# Allegro board 1-16_Power_Splitter.brd
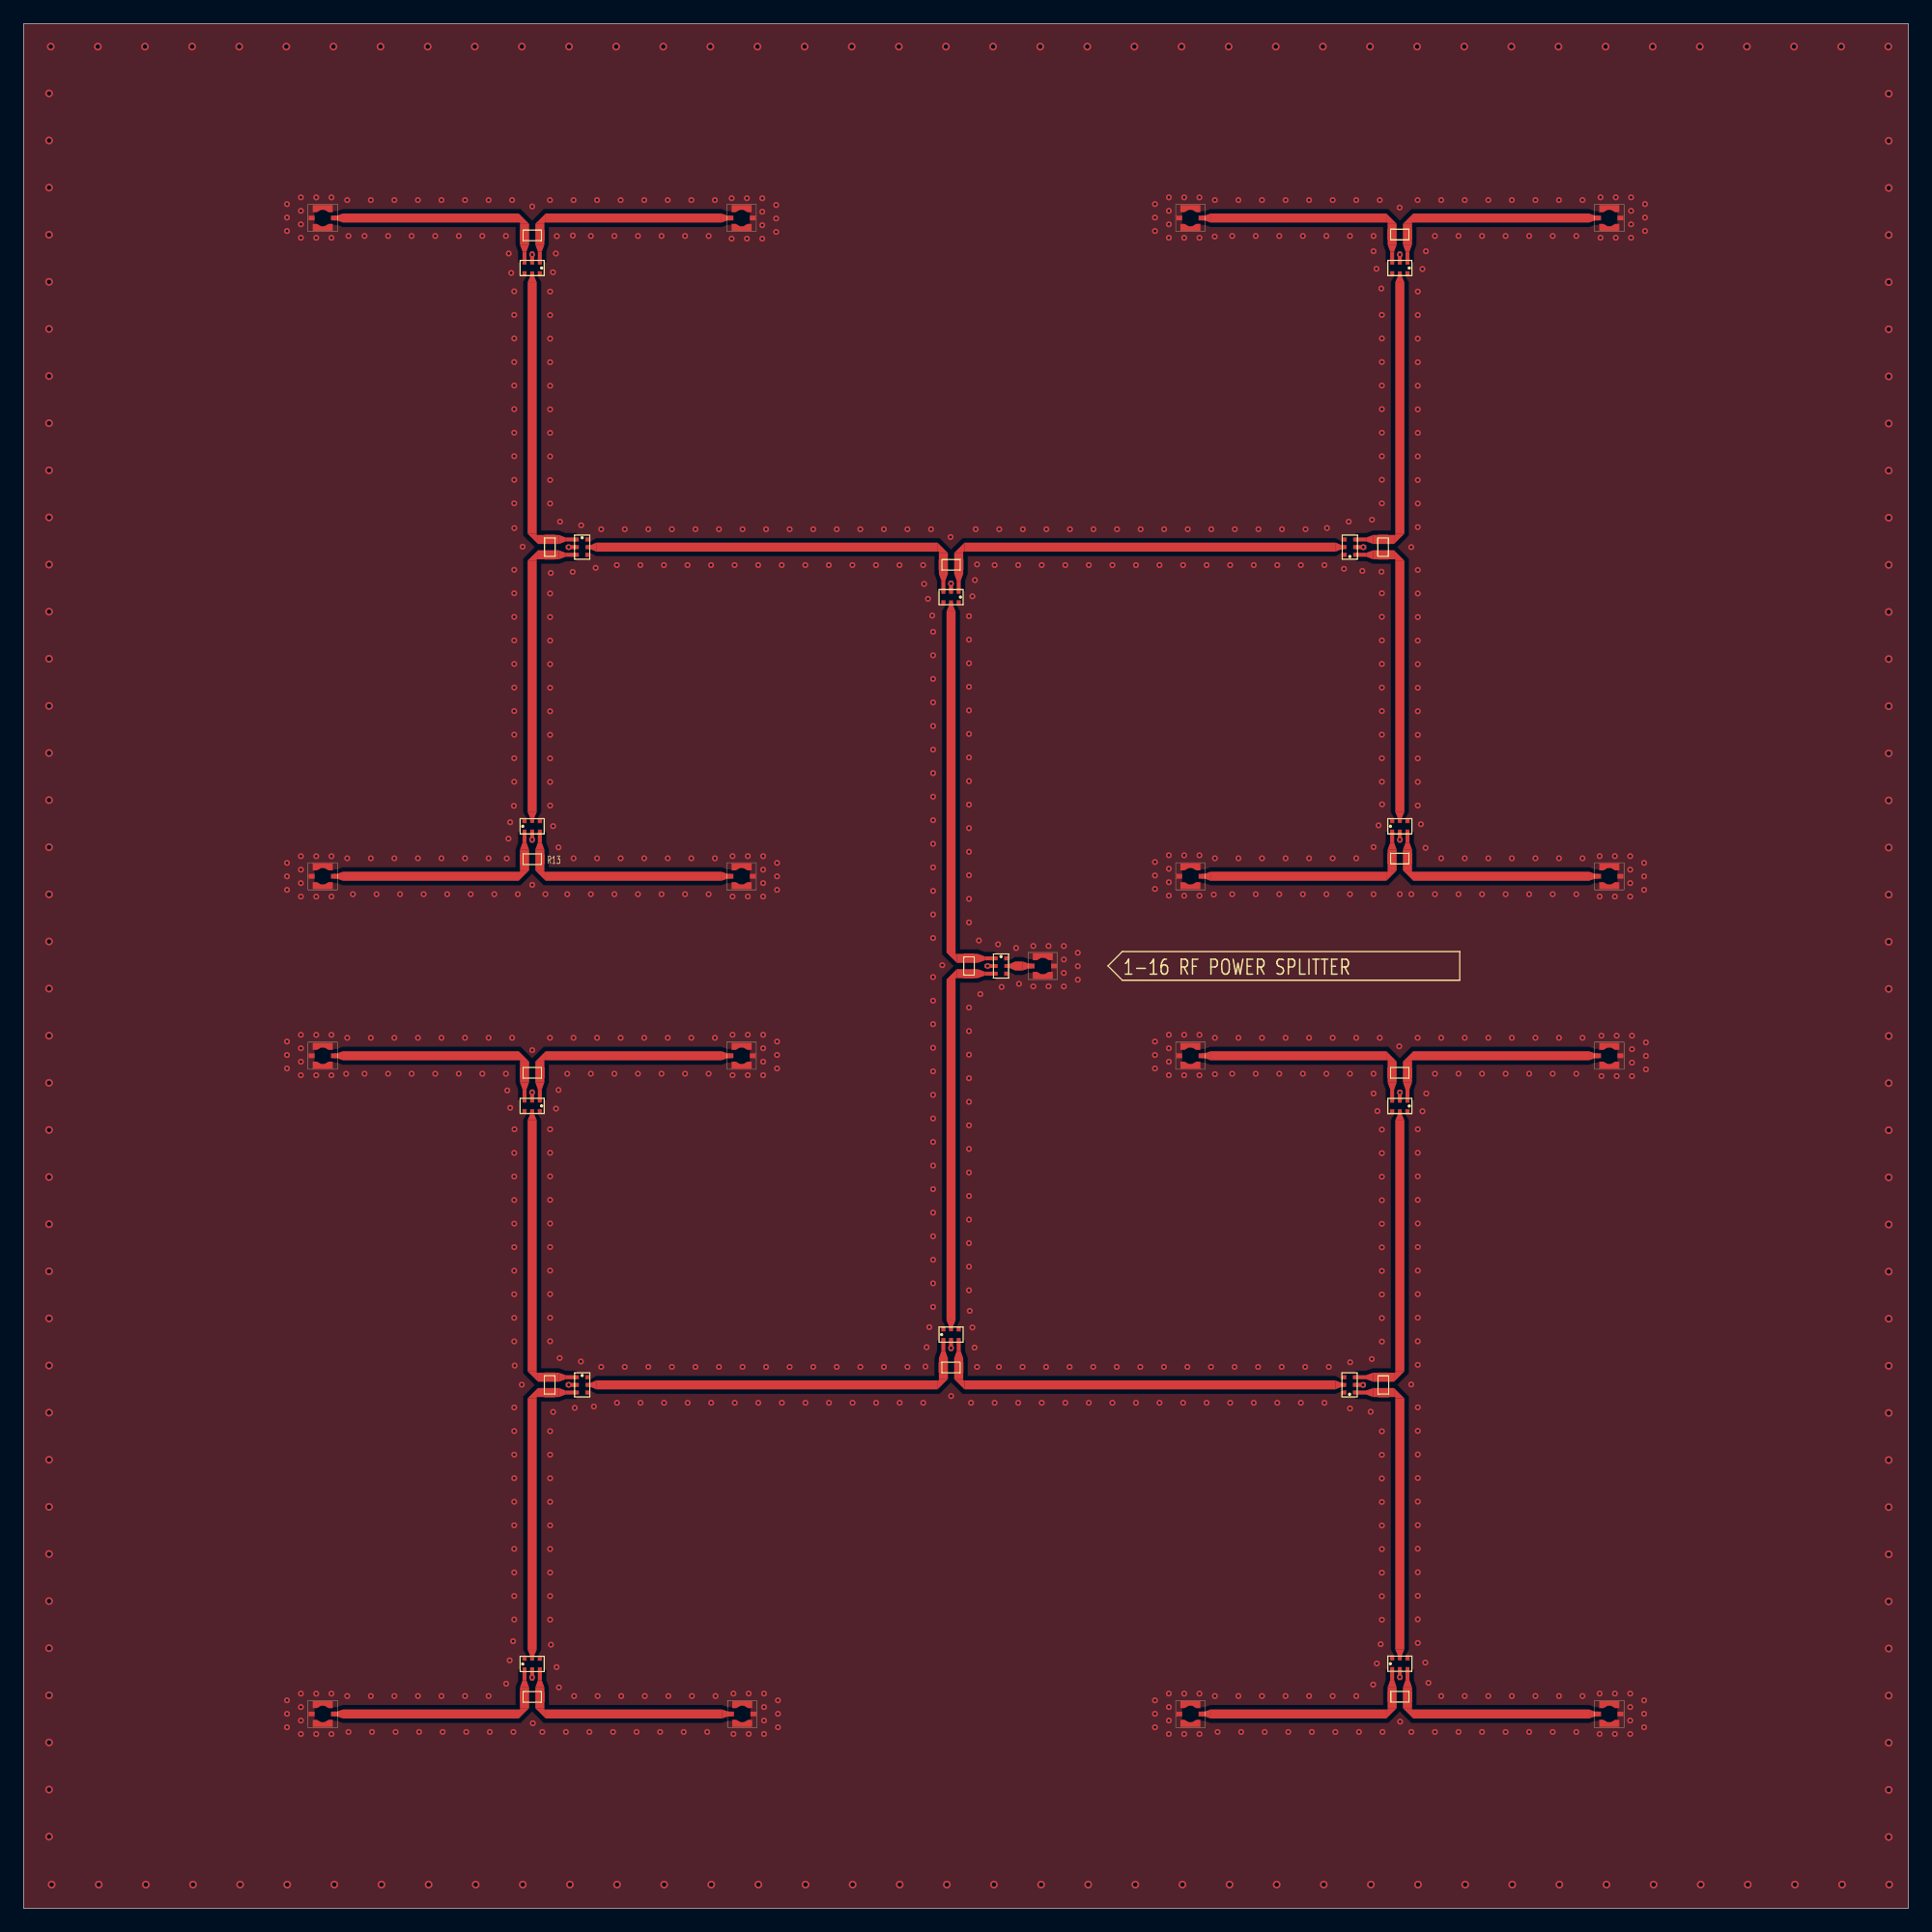
[diagram p0: board, top side]
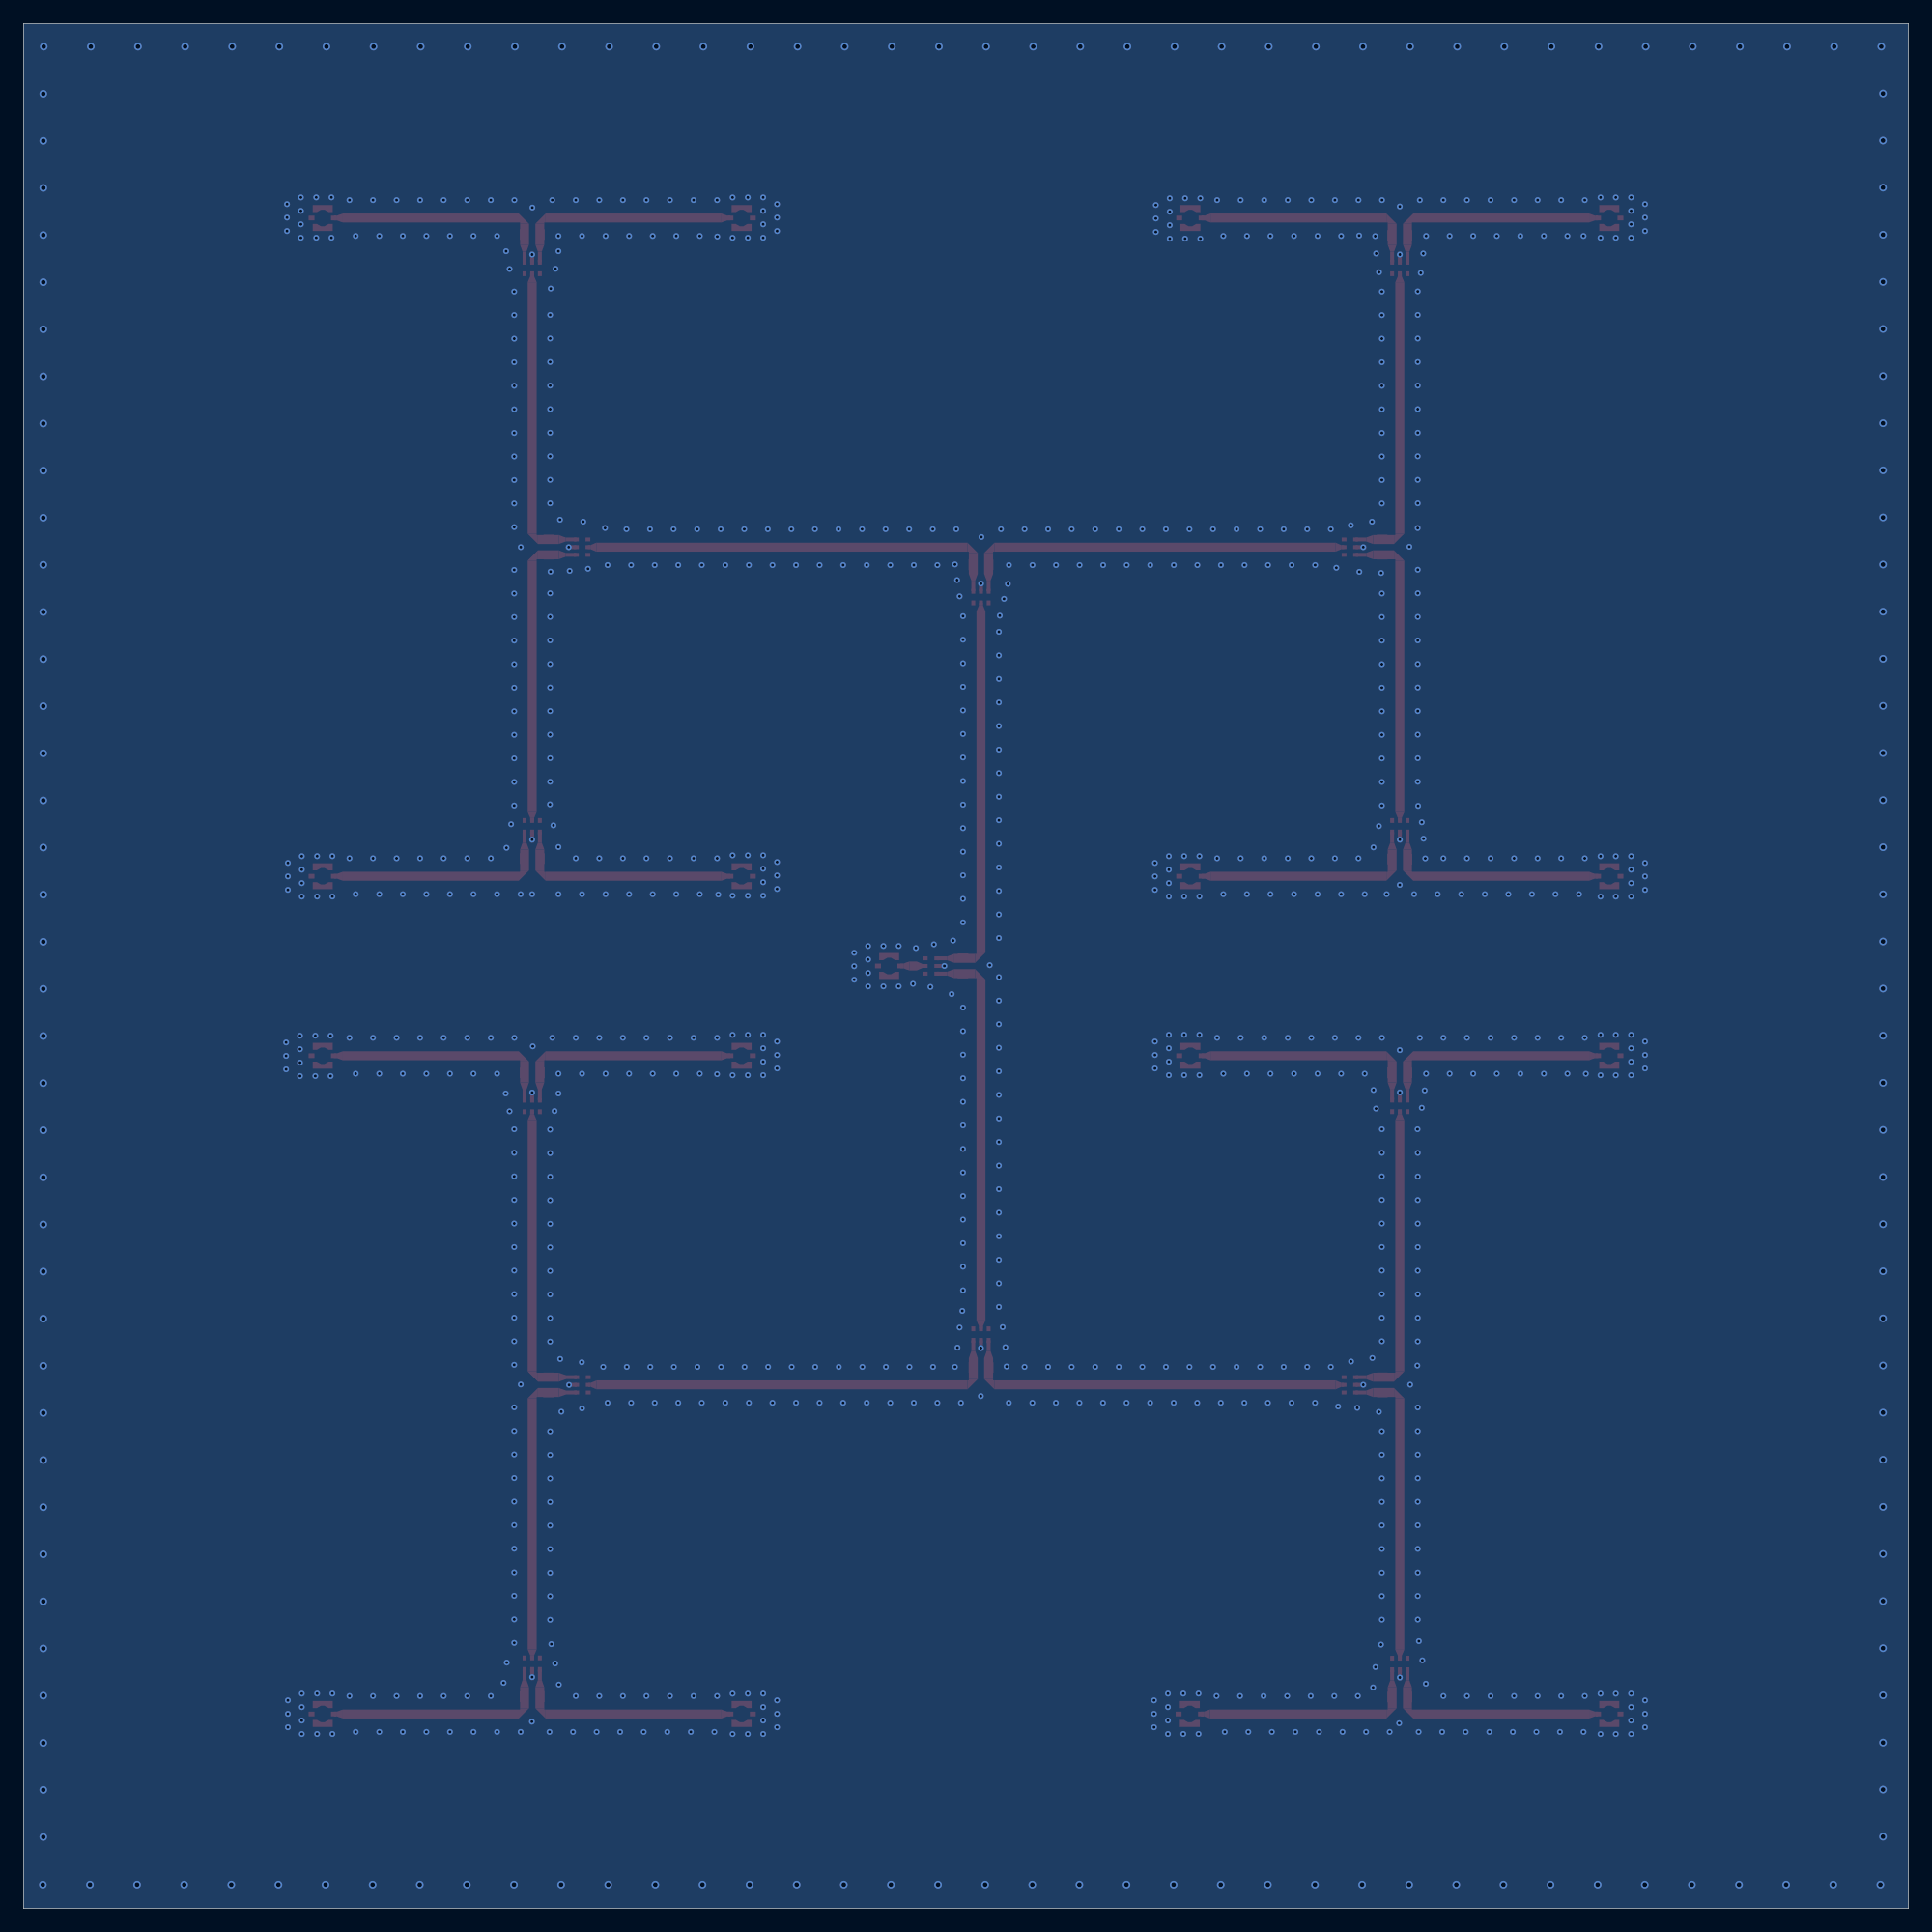
[diagram p1: board, bottom side, seen from below]

Outline 160.02 x 160.02 mm; copper layers: TOP, BOTTOM. Coordinates in mm from the lower left corner of the outline.
Outline path: 0,160.02 160.02,160.02 160.02,0 0,0 0,160.02

## Design rules (mm)
constraint set DEFAULT: min track width 0.127
net group GND: nets RFPINNET000007 RFPINNET000009 RFPINNET000012 RFPINNET000015 RFPINNET000017 RFPINNET000020 RFPINNET000024 RFPINNET000027 RFPINNET000030 RFPINNET000033 RFPINNET000037 RFPINNET000040 RFPINNET000043 RFPINNET000047 RFPINNET000052
net group N01086: nets N01086 RFPINNET000008 RFPINNET000010 RFPINNET000056 RFPINNET000059 RFPINNET000089 RFPINNET000122 RFPINNET000133
net group N01236: nets N01236 RFPINNET000011 RFPINNET000066 RFPINNET000067 RFPINNET000107 RFPINNET000196 RFPINNET000197
net group N01468: nets N01468 RFPINNET000014 RFPINNET000021 RFPINNET000072 RFPINNET000073 RFPINNET000148 RFPINNET000151 RFPINNET000170
net group N01612: nets N01612 RFPINNET000013 RFPINNET000077 RFPINNET000078 RFPINNET000142 RFPINNET000143 RFPINNET000168
net group N01924: nets N01924 RFPINNET000026 RFPINNET000034 RFPINNET000111 RFPINNET000153 RFPINNET000154 RFPINNET000189 RFPINNET000190
net group N02128: nets N02128 RFPINNET000028 RFPINNET000157 RFPINNET000158 RFPINNET000172 RFPINNET000186 RFPINNET000188
net group N02304: nets N02304 RFPINNET000016 RFPINNET000074 RFPINNET000083 RFPINNET000084 RFPINNET000155 RFPINNET000159 RFPINNET000163
net group N02444: nets N02444 RFPINNET000018 RFPINNET000087 RFPINNET000088 RFPINNET000161 RFPINNET000175 RFPINNET000176
net group N02649: nets N02649 RFPINNET000036 RFPINNET000050 RFPINNET000108 RFPINNET000109 RFPINNET000110 RFPINNET000198 RFPINNET000199
net group N02664: nets N02664 RFPINNET000038 RFPINNET000090 RFPINNET000112 RFPINNET000114 RFPINNET000213 RFPINNET000214
net group N03004: nets N03004 RFPINNET000039 RFPINNET000055 RFPINNET000069 RFPINNET000070 RFPINNET000116 RFPINNET000200 RFPINNET000201
net group N03112: nets N03112 RFPINNET000051 RFPINNET000071 RFPINNET000113 RFPINNET000115 RFPINNET000123 RFPINNET000221 RFPINNET000222
net group N03124: nets N03124 RFPINNET000053 RFPINNET000117 RFPINNET000118 RFPINNET000124 RFPINNET000215 RFPINNET000216
net group N03379: nets N03379 RFPINNET000035 RFPINNET000149 RFPINNET000150 RFPINNET000166 RFPINNET000194 RFPINNET000195
net group N03631: nets N03631 RFPINNET000062 RFPINNET000079 RFPINNET000126 RFPINNET000127 RFPINNET000152 RFPINNET000223 RFPINNET000224
net group N03641: nets N03641 RFPINNET000054 RFPINNET000119 RFPINNET000140 RFPINNET000141 RFPINNET000162 RFPINNET000219 RFPINNET000220
net group N03645: nets N03645 RFPINNET000057 RFPINNET000135 RFPINNET000136 RFPINNET000160 RFPINNET000217 RFPINNET000218
net group N03660: nets N03660 RFPINNET000022 RFPINNET000081 RFPINNET000095 RFPINNET000096 RFPINNET000147 RFPINNET000173 RFPINNET000174
net group N03664: nets N03664 RFPINNET000019 RFPINNET000091 RFPINNET000092 RFPINNET000138 RFPINNET000167 RFPINNET000171
net group N03694: nets N03694 RFPINNET000023 RFPINNET000105 RFPINNET000106 RFPINNET000169 RFPINNET000179 RFPINNET000180
net group N03732: nets N03732 RFPINNET000049 RFPINNET000103 RFPINNET000104 RFPINNET000139 RFPINNET000208 RFPINNET000209
net group N03747: nets N03747 RFPINNET000029 RFPINNET000048 RFPINNET000098 RFPINNET000099 RFPINNET000129 RFPINNET000183 RFPINNET000185
net group N03751: nets N03751 RFPINNET000031 RFPINNET000080 RFPINNET000082 RFPINNET000120 RFPINNET000181 RFPINNET000182
net group N11654: nets N11654 RFPINNET000042 RFPINNET000064 RFPINNET000065 RFPINNET000125 RFPINNET000204 RFPINNET000205
net group N13361: nets N13361 RFPINNET000058 RFPINNET000131 RFPINNET000132 RFPINNET000156 RFPINNET000225 RFPINNET000226
net group N17804: nets N17804 RFPINNET000041 RFPINNET000085 RFPINNET000086 RFPINNET000121 RFPINNET000206 RFPINNET000207
net group N18224: nets N18224 RFPINNET000044 RFPINNET000063 RFPINNET000075 RFPINNET000076 RFPINNET000130 RFPINNET000202 RFPINNET000203
net group N18325: nets N18325 RFPINNET000025 RFPINNET000045 RFPINNET000100 RFPINNET000101 RFPINNET000165 RFPINNET000177 RFPINNET000178
net group N24339: nets N24339 RFPINNET000032 RFPINNET000061 RFPINNET000145 RFPINNET000146 RFPINNET000164 RFPINNET000191 RFPINNET000192
net group N24871: nets N24871 RFPINNET000046 RFPINNET000068 RFPINNET000093 RFPINNET000094 RFPINNET000134 RFPINNET000211 RFPINNET000212
net group RFPINNET000001: nets RFPINNET000001 RFPINNET000002 RFPINNET000003 RFPINNET000004 RFPINNET000005 RFPINNET000006

## Placement (name value [footprint] x y rotation side)
IC1  PD3150J5050S2HF  [PWR_DIV]  112.6 115.57 180 top
IC2  PD3150J5050S2HF  [PWR_DIV]  116.84 91.87 90 top
IC3  PD3150J5050S2HF  [PWR_DIV]  78.74 111.33 270 top
IC4  PD3150J5050S2HF  [PWR_DIV]  82.98 80.01 0 top
IC5  PD3150J5050S2HF  [PWR_DIV]  116.84 139.27 270 top
IC6  PD3150J5050S2HF  [PWR_DIV]  43.18 139.27 270 top
IC7  PD3150J5050S2HF  [PWR_DIV]  47.42 115.57 0 top
IC8  PD3150J5050S2HF  [PWR_DIV]  43.18 91.87 90 top
IC9  PD3150J5050S2HF  [PWR_DIV]  116.84 20.78 90 top
IC10  PD3150J5050S2HF  [PWR_DIV]  43.18 68.14 270 top
IC11  PD3150J5050S2HF  [PWR_DIV]  116.84 68.13 270 top
IC12  PD3150J5050S2HF  [PWR_DIV]  47.42 44.45 0 top
IC13  PD3150J5050S2HF  [PWR_DIV]  78.74 48.72 90 top
IC14  PD3150J5050S2HF  [PWR_DIV]  43.18 20.75 90 top
IC15  PD3150J5050S2HF  [PWR_DIV]  112.57 44.45 180 top
J1  MM5829-2700  [CONNECTOR]  99.06 87.63 90 top
J2  MM5829-2700  [CONNECTOR]  86.53 80.01 270 top
J3  MM5829-2700  [CONNECTOR]  134.62 87.63 270 top
J4  MM5829-2700  [CONNECTOR]  134.62 143.51 270 top
J5  MM5829-2700  [CONNECTOR]  99.06 143.51 90 top
J6  MM5829-2700  [CONNECTOR]  60.96 143.51 270 top
J7  MM5829-2700  [CONNECTOR]  25.4 143.51 90 top
J8  MM5829-2700  [CONNECTOR]  99.06 16.51 90 top
J9  MM5829-2700  [CONNECTOR]  25.4 87.63 90 top
J10  MM5829-2700  [CONNECTOR]  134.62 16.51 270 top
J11  MM5829-2700  [CONNECTOR]  60.96 87.63 270 top
J12  MM5829-2700  [CONNECTOR]  60.96 72.39 270 top
J13  MM5829-2700  [CONNECTOR]  134.62 72.39 270 top
J14  MM5829-2700  [CONNECTOR]  25.4 72.39 90 top
J15  MM5829-2700  [CONNECTOR]  25.4 16.51 90 top
J16  MM5829-2700  [CONNECTOR]  99.06 72.39 90 top
J17  MM5829-2700  [CONNECTOR]  61.01 16.51 270 top
R1  100  [R0603]  80.27 80.01 270 top
R2  100  [R0603]  78.74 114.07 180 top
R3  100  [R0603]  115.42 115.57 90 top
R4  100  [R0603]  116.84 89.13 0 top
R5  100  [R0603]  116.84 142.11 180 top
R6  100  [R0603]  43.18 142.04 180 top
R7  100  [R0603]  78.73 45.92 0 top
R8  100  [R0603]  44.67 44.45 270 top
R9  100  [R0603]  44.68 115.57 270 top
R10  100  [R0603]  115.44 44.44 90 top
R11  100  [R0603]  43.18 17.96 0 top
R12  100  [R0603]  43.19 70.94 180 top
R13  100  [R0603]  43.18 89.08 0 top
R14  100  [R0603]  116.83 70.94 180 top
R15  100  [R0603]  116.84 17.98 0 top
RFU1  -  [MLIN#8]  84.82 80.01 180 top
RFU2  -  [MLIN#12]  83.48 80.01 0 top
RFU3  -  [MTAPER]  83.69 80.01 0 top
RFU4  -  [MLIN]  85.58 80.01 180 top
RFU5  -  [MTAPER]  85.33 80.01 180 top
RFU6  -  [MLIN#3]  82.49 80.01 180 top
RFU7  -  [MLIN#3]  82.49 80.66 180 top
RFU8  -  [MLIN#3]  82.49 79.36 180 top
RFU9  -  [MLIN#3]  78.74 111.82 90 top
RFU10  -  [MLIN#3]  78.09 111.82 90 top
RFU11  -  [MLIN#3]  79.39 111.82 90 top
RFU12  -  [MLIN#3]  46.93 115.57 180 top
RFU13  -  [MLIN#3]  46.93 116.22 180 top
RFU14  -  [MLIN#3]  46.93 114.92 180 top
RFU15  -  [MLIN#3]  43.18 139.76 90 top
RFU16  -  [MLIN#3]  42.53 139.76 90 top
RFU17  -  [MLIN#3]  43.83 139.76 90 top
RFU18  -  [MLIN#3]  43.18 91.38 270 top
RFU19  -  [MLIN#3]  43.83 91.38 270 top
RFU20  -  [MLIN#3]  42.53 91.38 270 top
RFU21  -  [MLIN#3]  113.09 115.57 0 top
RFU22  -  [MLIN#3]  113.09 114.92 0 top
RFU23  -  [MLIN#3]  113.09 116.22 0 top
RFU24  -  [MLIN#3]  116.84 139.76 90 top
RFU25  -  [MLIN#3]  117.49 139.76 90 top
RFU26  -  [MLIN#3]  116.19 139.76 90 top
RFU27  -  [MLIN#3]  116.84 91.38 270 top
RFU28  -  [MLIN#3]  116.19 91.38 270 top
RFU29  -  [MLIN#3]  117.49 91.38 270 top
RFU30  -  [MLIN#3]  78.74 48.23 270 top
RFU31  -  [MLIN#3]  78.09 48.23 270 top
RFU32  -  [MLIN#3]  79.39 48.23 270 top
RFU33  -  [MLIN#3]  46.93 44.45 180 top
RFU34  -  [MLIN#3]  46.93 45.1 180 top
RFU35  -  [MLIN#3]  46.93 43.8 180 top
RFU36  -  [MLIN#3]  43.18 68.63 90 top
RFU37  -  [MLIN#3]  42.53 68.63 90 top
RFU38  -  [MLIN#3]  43.83 68.63 90 top
RFU39  -  [MLIN#3]  43.18 20.26 270 top
RFU40  -  [MLIN#3]  42.53 20.26 270 top
RFU41  -  [MLIN#3]  43.83 20.26 270 top
RFU42  -  [MLIN#3]  113.06 44.45 0 top
RFU43  -  [MLIN#3]  113.06 43.8 0 top
RFU44  -  [MLIN#3]  113.06 45.1 0 top
RFU45  -  [MLIN#3]  116.84 68.62 90 top
RFU46  -  [MLIN#3]  117.49 68.62 90 top
RFU47  -  [MLIN#3]  116.19 68.62 90 top
RFU48  -  [MLIN#3]  116.84 20.29 270 top
RFU49  -  [MLIN#3]  117.49 20.29 270 top
RFU50  -  [MLIN#3]  116.19 20.29 270 top
RFU51  -  [MLIN#4]  78.74 81.15 90 top
RFU52  -  [MBEND#2]  79.23 80.66 180 top
RFU53  -  [MLIN#2]  79.23 80.66 0 top
RFU54  -  [MLIN#11]  78.74 49.92 90 top
RFU55  -  [MBEND]  79.23 79.36 180 top
RFU56  -  [MLIN#2]  79.23 79.36 0 top
RFU57  -  [MLIN#6]  111.4 115.57 180 top
RFU58  -  [MBEND#2]  79.39 115.08 90 top
RFU59  -  [MLIN#2]  78.09 44.94 90 top
RFU60  -  [MLIN#4]  77.6 115.57 180 top
RFU61  -  [MBEND]  78.09 115.08 90 top
RFU62  -  [MLIN#6]  111.37 44.45 180 top
RFU63  -  [MLIN#5]  43.18 116.71 90 top
RFU64  -  [MBEND#2]  43.67 116.22 180 top
RFU65  -  [MLIN#2]  43.67 45.1 0 top
RFU66  -  [MLIN#5]  43.18 93.07 90 top
RFU67  -  [MBEND]  43.67 114.92 180 top
RFU68  -  [MLIN#2]  43.67 43.8 0 top
RFU69  -  [MLIN#9]  42.04 143.51 180 top
RFU70  -  [MBEND]  42.53 143.02 90 top
RFU71  -  [MLIN#2]  42.53 71.9 270 top
RFU72  -  [MLIN#9]  59.25 143.51 180 top
RFU73  -  [MBEND#2]  43.83 143.02 90 top
RFU74  -  [MLIN#2]  43.83 71.9 270 top
RFU75  -  [MLIN#9]  42.04 87.63 180 top
RFU76  -  [MBEND#2]  42.53 88.12 270 top
RFU77  -  [MLIN#2]  42.53 17 90 top
RFU78  -  [MLIN#9]  59.25 87.63 180 top
RFU79  -  [MBEND]  43.83 88.12 270 top
RFU80  -  [MLIN#2]  43.83 17 90 top
RFU81  -  [MLIN#9]  42.04 72.39 180 top
RFU82  -  [MBEND]  42.53 71.9 90 top
RFU83  -  [MLIN#7]  116.84 45.59 90 top
RFU84  -  [MLIN#9]  59.25 72.39 180 top
RFU85  -  [MBEND#2]  43.83 71.9 90 top
RFU86  -  [MLIN#7]  116.84 21.98 90 top
RFU87  -  [MLIN#7]  43.18 45.59 90 top
RFU88  -  [MBEND#2]  43.67 45.1 180 top
RFU89  -  [MLIN#2]  116.19 17 90 top
RFU90  -  [MLIN#5]  43.18 21.96 90 top
RFU91  -  [MBEND]  43.67 43.8 180 top
RFU92  -  [MLIN#2]  117.49 17 90 top
RFU93  -  [MLIN#9]  42.04 16.51 180 top
RFU94  -  [MBEND#2]  42.53 17 270 top
RFU95  -  [MLIN#2]  116.19 71.9 270 top
RFU96  -  [MLIN#10]  59.3 16.51 180 top
RFU97  -  [MBEND]  43.83 17 270 top
RFU98  -  [MLIN#2]  117.49 71.9 270 top
RFU99  -  [MLIN#4]  77.6 44.45 180 top
RFU100  -  [MBEND#2]  78.09 44.94 270 top
RFU101  -  [MLIN#2]  116.19 88.12 90 top
RFU102  -  [MBEND]  79.39 44.94 270 top
RFU103  -  [MLIN#2]  79.39 44.94 90 top
RFU104  -  [MLIN#2]  117.49 88.12 90 top
RFU105  -  [MBEND]  116.35 45.1 0 top
RFU106  -  [MLIN#2]  116.35 45.1 180 top
RFU107  -  [MLIN#2]  78.09 115.08 270 top
RFU108  -  [MBEND#2]  116.35 43.8 0 top
RFU109  -  [MLIN#2]  116.35 43.8 180 top
RFU110  -  [MLIN#2]  79.39 115.08 270 top
RFU111  -  [MLIN#9]  115.7 16.51 180 top
RFU112  -  [MBEND#2]  116.19 17 270 top
RFU113  -  [MLIN#2]  116.35 116.22 180 top
RFU114  -  [MLIN#9]  132.91 16.51 180 top
RFU115  -  [MBEND]  117.49 17 270 top
RFU116  -  [MLIN#2]  116.35 114.92 180 top
RFU117  -  [MLIN#9]  115.7 72.39 180 top
RFU118  -  [MBEND]  116.19 71.9 90 top
RFU119  -  [MLIN#2]  116.19 143.02 270 top
RFU120  -  [MLIN#9]  132.91 72.39 180 top
RFU121  -  [MBEND#2]  117.49 71.9 90 top
RFU122  -  [MLIN#2]  117.49 143.02 270 top
RFU123  -  [MLIN#9]  115.7 87.63 180 top
RFU124  -  [MBEND#2]  116.19 88.12 270 top
RFU125  -  [MLIN#2]  42.53 143.02 270 top
RFU126  -  [MLIN#9]  132.91 87.63 180 top
RFU127  -  [MBEND]  117.49 88.12 270 top
RFU128  -  [MLIN#2]  43.83 143.02 270 top
RFU129  -  [MLIN#5]  116.84 93.07 90 top
RFU130  -  [MBEND#2]  116.35 114.92 0 top
RFU131  -  [MLIN#2]  43.67 116.22 0 top
RFU132  -  [MLIN#5]  116.84 116.71 90 top
RFU133  -  [MBEND]  116.35 116.22 0 top
RFU134  -  [MLIN#2]  43.67 114.92 0 top
RFU135  -  [MLIN#9]  115.7 143.51 180 top
RFU136  -  [MBEND]  116.19 143.02 90 top
RFU137  -  [MLIN#2]  42.53 88.12 90 top
RFU138  -  [MLIN#9]  132.91 143.51 180 top
RFU139  -  [MBEND#2]  117.49 143.02 90 top
RFU140  -  [MLIN#2]  43.83 88.12 90 top
RFU141  -  [MTAPER#2]  81.6 80.66 180 top
RFU142  -  [MTAPER#2]  81.6 79.36 180 top
RFU143  -  [MTAPER#2]  78.09 112.72 90 top
RFU144  -  [MTAPER#2]  79.39 112.72 90 top
RFU145  -  [MTAPER#2]  46.03 116.22 180 top
RFU146  -  [MTAPER#2]  46.03 114.92 180 top
RFU147  -  [MTAPER#2]  42.53 89.89 90 top
RFU148  -  [MTAPER#2]  43.83 89.89 90 top
RFU149  -  [MTAPER#2]  43.83 140.66 90 top
RFU150  -  [MTAPER#2]  42.53 140.66 90 top
RFU151  -  [MTAPER#2]  116.19 140.66 90 top
RFU152  -  [MTAPER#2]  117.49 140.66 90 top
RFU153  -  [MTAPER#2]  114.58 116.22 180 top
RFU154  -  [MTAPER#2]  114.58 114.92 180 top
RFU155  -  [MTAPER#2]  116.19 89.89 90 top
RFU156  -  [MTAPER#2]  117.49 89.89 90 top
RFU157  -  [MTAPER#2]  78.09 46.71 90 top
RFU158  -  [MTAPER#2]  79.39 46.71 90 top
RFU159  -  [MTAPER#2]  46.03 45.1 180 top
RFU160  -  [MTAPER#2]  46.03 43.8 180 top
RFU161  -  [MTAPER#2]  42.53 69.52 90 top
RFU162  -  [MTAPER#2]  43.83 69.52 90 top
RFU163  -  [MTAPER#2]  42.53 18.77 90 top
RFU164  -  [MTAPER#2]  43.83 18.77 90 top
RFU165  -  [MTAPER#2]  114.58 45.1 180 top
RFU166  -  [MTAPER#2]  114.58 43.8 180 top
RFU167  -  [MTAPER#2]  116.19 18.77 90 top
RFU168  -  [MTAPER#2]  117.49 18.77 90 top
RFU169  -  [MTAPER#2]  116.19 69.51 90 top
RFU170  -  [MTAPER#2]  117.49 69.51 90 top
RFU171  -  [MLIN#12]  78.74 110.84 270 top
RFU172  -  [MTAPER]  78.74 110.63 270 top
RFU173  -  [MLIN#12]  47.91 115.57 0 top
RFU174  -  [MTAPER]  48.12 115.57 0 top
RFU175  -  [MLIN#12]  112.11 115.57 180 top
RFU176  -  [MTAPER]  111.9 115.57 180 top
RFU177  -  [MLIN#12]  43.18 138.78 270 top
RFU178  -  [MTAPER]  43.18 138.57 270 top
RFU179  -  [MLIN]  26.35 143.51 0 top
RFU180  -  [MTAPER]  26.6 143.51 0 top
RFU181  -  [MLIN]  60.01 143.51 180 top
RFU182  -  [MTAPER]  59.76 143.51 180 top
RFU183  -  [MLIN#12]  43.18 92.36 90 top
RFU184  -  [MTAPER]  43.18 92.57 90 top
RFU185  -  [MLIN]  26.35 87.63 0 top
RFU186  -  [MTAPER]  26.6 87.63 0 top
RFU187  -  [MLIN]  60.01 87.63 180 top
RFU188  -  [MTAPER]  59.76 87.63 180 top
RFU189  -  [MLIN]  100.01 143.51 0 top
RFU190  -  [MTAPER]  100.26 143.51 0 top
RFU191  -  [MLIN]  133.67 143.51 180 top
RFU192  -  [MTAPER]  133.42 143.51 180 top
RFU193  -  [MLIN#12]  116.84 138.78 270 top
RFU194  -  [MTAPER]  116.84 138.57 270 top
RFU195  -  [MLIN#12]  116.84 92.36 90 top
RFU196  -  [MTAPER]  116.84 92.57 90 top
RFU197  -  [MLIN]  100.01 87.63 0 top
RFU198  -  [MTAPER]  100.26 87.63 0 top
RFU199  -  [MLIN]  133.67 87.63 180 top
RFU200  -  [MTAPER]  133.42 87.63 180 top
RFU201  -  [MLIN#12]  78.74 49.21 90 top
RFU202  -  [MTAPER]  78.74 49.41 90 top
RFU203  -  [MLIN#12]  47.91 44.45 0 top
RFU204  -  [MTAPER]  48.12 44.45 0 top
RFU205  -  [MLIN#12]  43.18 67.65 270 top
RFU206  -  [MTAPER]  43.18 67.44 270 top
RFU207  -  [MLIN]  60.01 72.39 180 top
RFU208  -  [MTAPER]  59.76 72.39 180 top
RFU209  -  [MLIN]  26.35 72.39 0 top
RFU210  -  [MTAPER]  26.6 72.39 0 top
RFU211  -  [MLIN#12]  43.18 21.24 90 top
RFU212  -  [MTAPER]  43.18 21.45 90 top
RFU213  -  [MLIN]  60.06 16.51 180 top
RFU214  -  [MTAPER]  59.81 16.51 180 top
RFU215  -  [MLIN]  26.35 16.51 0 top
RFU216  -  [MTAPER]  26.6 16.51 0 top
RFU217  -  [MLIN#12]  112.08 44.45 180 top
RFU218  -  [MTAPER]  111.88 44.45 180 top
RFU219  -  [MLIN#12]  116.84 67.64 270 top
RFU220  -  [MTAPER]  116.84 67.43 270 top
RFU221  -  [MLIN]  100.01 72.39 0 top
RFU222  -  [MTAPER]  100.26 72.39 0 top
RFU223  -  [MLIN]  133.67 72.39 180 top
RFU224  -  [MTAPER]  133.42 72.39 180 top
RFU225  -  [MLIN#12]  116.84 21.27 90 top
RFU226  -  [MTAPER]  116.84 21.47 90 top
RFU227  -  [MLIN]  100.01 16.51 0 top
RFU228  -  [MTAPER]  100.26 16.51 0 top
RFU229  -  [MLIN]  133.67 16.51 180 top
RFU230  -  [MTAPER]  133.42 16.51 180 top

## Library data of the parts
IC1-IC15 = Power_Divider
J1-J17 = Microwave_Coaxial_Connector
R1-R15 = R0603_100
RFU1 RFU2 RFU4 RFU6-RFU51 RFU53 RFU54 RFU56 RFU57 RFU59 RFU60 RFU62 RFU63 RFU65 RFU66 RFU68 RFU69 RFU71 RFU72 RFU74 RFU75 RFU77 RFU78 RFU80 RFU81 RFU83 RFU84 RFU86 RFU87 RFU89 RFU90 RFU92 RFU93 RFU95 RFU96 RFU98 RFU99 RFU101 RFU103 RFU104 RFU106 RFU107 RFU109-RFU111 RFU113 RFU114 RFU116 RFU117 RFU119 RFU120 RFU122 RFU123 RFU125 RFU126 RFU128 RFU129 RFU131 RFU132 RFU134 RFU135 RFU137 RFU138 RFU140 RFU171 RFU173 RFU175 RFU177 RFU179 RFU181 RFU183 RFU185 RFU187 RFU189 RFU191 RFU193 RFU195 RFU197 RFU199 RFU201 RFU203 RFU205 RFU207 RFU209 RFU211 RFU213 RFU215 RFU217 RFU219 RFU221 RFU223 RFU225 RFU227 RFU229 = MLIN
RFU3 RFU5 RFU141-RFU170 RFU172 RFU174 RFU176 RFU178 RFU180 RFU182 RFU184 RFU186 RFU188 RFU190 RFU192 RFU194 RFU196 RFU198 RFU200 RFU202 RFU204 RFU206 RFU208 RFU210 RFU212 RFU214 RFU216 RFU218 RFU220 RFU222 RFU224 RFU226 RFU228 RFU230 = MTAPER
RFU52 RFU55 RFU58 RFU61 RFU64 RFU67 RFU70 RFU73 RFU76 RFU79 RFU82 RFU85 RFU88 RFU91 RFU94 RFU97 RFU100 RFU102 RFU105 RFU108 RFU112 RFU115 RFU118 RFU121 RFU124 RFU127 RFU130 RFU133 RFU136 RFU139 = MBEND

## Footprints (pads in the part's own frame, mm; a bottom-side part is the same pattern mirrored in y, then rotated)
CONNECTOR
  rect 0.4x0.5 smd: 1(0,-0.95) 3(0,0.95)
  custom 0.6x1.7 smd: 2(0.8,0) 4(-0.8,0)
MBEND
  round 0 smd: 1(0,0) 2(0.49,0.49)
MBEND#2
  round 0 smd: 1(0,0) 2(0.49,-0.49)
MLIN
  round 0 smd: 1(0,0) 2(0.25,0)
MLIN#12
  round 0 smd: 1(0,0) 2(0.205,0)
MLIN#2
  round 0 smd: 1(0,0) 2(1.774,0)
MLIN#3
  round 0 smd: 1(0,0) 2(0.899,0)
MLIN#4
  round 0 smd: 1(0,0) 2(28.975,0)
MLIN#5
  round 0 smd: 1(0,0) 2(21.355,0)
MLIN#6
  round 0 smd: 1(0,0) 2(31.49,0)
MLIN#7
  round 0 smd: 1(0,0) 2(21.333,0)
MLIN#8
  round 0 smd: 1(0,0) 2(0.631,0)
MLIN#9
  round 0 smd: 1(0,0) 2(14.932,0)
MLIN#10
  round 0 smd: 1(0,0) 2(14.982,0)
MLIN#11
  round 0 smd: 1(0,0) 2(28.95,0)
MTAPER
  round 0 smd: 1(0,0) 2(0.508,0)
MTAPER#2
  round 0 smd: 1(0,0) 2(0.617,0)
PWR_DIV
  rect 0.41x0.33 smd: 1(-0.49,0.65) 2(-0.49,0) 3(-0.49,-0.65) 4(0.49,-0.65) 5(0.49,0) 6(0.49,0.65)
R0603
  rect 0.6x0.9 smd: 1(-0.75,0) 2(0.75,0)

## Nets
GND: IC1.2 IC1.4 IC1.6 IC2.2 IC2.4 IC2.6 IC3.2 IC3.4 IC3.6 IC4.2 IC4.4 IC4.6 IC5.2 IC5.4 IC5.6 IC6.2 IC6.4 IC6.6 IC7.2 IC7.4 IC7.6 IC8.2 IC8.4 IC8.6 IC9.2 IC9.4 IC9.6 IC10.2 IC10.4 IC10.6 IC11.2 IC11.4 IC11.6 IC12.2 IC12.4 IC12.6 IC13.2 IC13.4 IC13.6 IC14.2 IC14.4 IC14.6 IC15.2 IC15.4 IC15.6 J1.2 J1.3 J1.4(OUTER3) J2.2 J2.3 J2.4(OUTER3) J3.2 J3.3 J3.4(OUTER3) J4.2 J4.3 J4.4(OUTER3) J5.2 J5.3 J5.4(OUTER3) J6.2 J6.3 J6.4(OUTER3) J7.2 J7.3 J7.4(OUTER3) J8.2 J8.3 J8.4(OUTER3) J9.2 J9.3 J9.4(OUTER3) J10.2 J10.3 J10.4(OUTER3) J11.2 J11.3 J11.4(OUTER3) J12.2 J12.3 J12.4(OUTER3) J13.2 J13.3 J13.4(OUTER3) J14.2 J14.3 J14.4(OUTER3) J15.2 J15.3 J15.4(OUTER3) J16.2 J16.3 J16.4(OUTER3) J17.2 J17.3 J17.4(OUTER3) RFU6.1 RFU9.1 RFU12.1 RFU15.1 RFU18.1 RFU21.1 RFU24.1 RFU27.1 RFU30.1 RFU33.1 RFU36.1 RFU39.1 RFU42.1 RFU45.1 RFU48.1
RFPINNET000001: RFU2.1
RFPINNET000002: J2.1 RFU4.1
RFPINNET000003: RFU1.2 RFU3.2
RFPINNET000004: RFU2.2 RFU3.1
RFPINNET000005: RFU1.1 RFU5.2
RFPINNET000006: RFU4.2 RFU5.1
RFPINNET000007: RFU6.2
RFPINNET000008: IC4.1(OUT2) RFU7.1
RFPINNET000009: RFU9.2
RFPINNET000010: RFU7.2 RFU141.1
RFPINNET000011: RFU8.2 RFU142.1
RFPINNET000012: RFU12.2
RFPINNET000013: RFU10.2 RFU143.1
RFPINNET000014: RFU11.2 RFU144.1
RFPINNET000015: RFU15.2
RFPINNET000016: RFU13.2 RFU145.1
RFPINNET000017: RFU18.2
RFPINNET000018: RFU14.2 RFU146.1
RFPINNET000019: RFU16.2 RFU150.1
RFPINNET000020: RFU21.2
RFPINNET000021: IC3.1(OUT2) RFU11.1
RFPINNET000022: RFU17.2 RFU149.1
RFPINNET000023: RFU19.2 RFU148.2
RFPINNET000024: RFU24.2
RFPINNET000025: RFU20.2 RFU147.2
RFPINNET000026: RFU22.2 RFU154.2
RFPINNET000027: RFU27.2
RFPINNET000028: RFU23.2 RFU153.2
RFPINNET000029: RFU25.2 RFU152.1
RFPINNET000030: RFU30.2
RFPINNET000031: RFU26.2 RFU151.1
RFPINNET000032: RFU28.2 RFU155.2
RFPINNET000033: RFU33.2
RFPINNET000034: IC1.1(OUT2) RFU22.1
RFPINNET000035: RFU29.2 RFU156.2
RFPINNET000036: RFU31.2 RFU157.2
RFPINNET000037: RFU36.2
RFPINNET000038: RFU32.2 RFU158.2
RFPINNET000039: RFU34.2 RFU159.1
RFPINNET000040: RFU39.2
RFPINNET000041: RFU35.2 RFU160.1
RFPINNET000042: RFU37.2 RFU161.1
RFPINNET000043: RFU42.2
RFPINNET000044: RFU38.2 RFU162.1
RFPINNET000045: IC8.1(OUT2) RFU20.1
RFPINNET000046: RFU40.2 RFU163.2
RFPINNET000047: RFU45.2
RFPINNET000048: IC5.1(OUT2) RFU25.1
RFPINNET000049: RFU41.2 RFU164.2
RFPINNET000050: IC13.1(OUT2) RFU31.1
RFPINNET000051: RFU43.2 RFU166.2
RFPINNET000052: RFU48.2
RFPINNET000053: RFU44.2 RFU165.2
RFPINNET000054: RFU46.2 RFU170.1
RFPINNET000055: IC12.1(OUT2) RFU34.1
RFPINNET000056: RFU51.1 RFU52.2
RFPINNET000057: RFU47.2 RFU169.1
RFPINNET000058: RFU49.2 RFU168.2
RFPINNET000059: RFU52.1 RFU53.1
RFPINNET000061: IC2.1(OUT2) RFU28.1
RFPINNET000062: RFU50.2 RFU167.2
RFPINNET000063: IC10.1(OUT2) RFU38.1
RFPINNET000064: RFU81.1 RFU82.2
RFPINNET000065: RFU71.1 RFU82.1
RFPINNET000066: RFU54.2 RFU55.2
RFPINNET000067: RFU55.1 RFU56.1
RFPINNET000068: IC14.1(OUT2) RFU40.1
RFPINNET000069: RFU87.1 RFU88.2
RFPINNET000070: RFU65.1 RFU88.1
RFPINNET000071: IC15.1(OUT2) RFU43.1
RFPINNET000072: RFU57.2 RFU58.2
RFPINNET000073: RFU58.1 RFU110.1
RFPINNET000074: IC7.1(OUT2) RFU13.1
RFPINNET000075: RFU84.2 RFU85.2
RFPINNET000076: RFU74.1 RFU85.1
RFPINNET000077: RFU60.1 RFU61.2
RFPINNET000078: RFU61.1 RFU107.1
RFPINNET000079: IC9.1(OUT2) RFU50.1
RFPINNET000080: RFU135.1 RFU136.2
RFPINNET000081: IC6.1(OUT2) RFU17.1
RFPINNET000082: RFU119.1 RFU136.1
RFPINNET000083: RFU63.1 RFU64.2
RFPINNET000084: RFU64.1 RFU131.1
RFPINNET000085: RFU90.2 RFU91.2
RFPINNET000086: RFU68.1 RFU91.1
RFPINNET000087: RFU66.2 RFU67.2
RFPINNET000088: RFU67.1 RFU134.1
RFPINNET000089: RFU53.2 RFU141.2
RFPINNET000090: RFU62.2 RFU102.2
RFPINNET000091: RFU69.1 RFU70.2
RFPINNET000092: RFU70.1 RFU125.1
RFPINNET000093: RFU93.1 RFU94.2
RFPINNET000094: RFU77.1 RFU94.1
RFPINNET000095: RFU72.2 RFU73.2
RFPINNET000096: RFU73.1 RFU128.1
RFPINNET000098: RFU138.2 RFU139.2
RFPINNET000099: RFU122.1 RFU139.1
RFPINNET000100: RFU75.1 RFU76.2
RFPINNET000101: RFU76.1 RFU137.1
RFPINNET000103: RFU96.2 RFU97.2
RFPINNET000104: RFU80.1 RFU97.1
RFPINNET000105: RFU78.2 RFU79.2
RFPINNET000106: RFU79.1 RFU140.1
RFPINNET000107: RFU56.2 RFU142.2
RFPINNET000108: RFU59.2 RFU157.1
RFPINNET000109: RFU99.1 RFU100.2
RFPINNET000110: RFU59.1 RFU100.1
RFPINNET000111: RFU116.2 RFU154.1
RFPINNET000112: RFU102.1 RFU103.1
RFPINNET000113: RFU86.2 RFU108.2
RFPINNET000114: RFU103.2 RFU158.1
RFPINNET000115: RFU108.1 RFU109.1
RFPINNET000116: RFU65.2 RFU159.2
RFPINNET000117: RFU83.1 RFU105.2
RFPINNET000118: RFU105.1 RFU106.1
RFPINNET000119: IC11.1(OUT2) RFU46.1
RFPINNET000120: RFU119.2 RFU151.2
RFPINNET000121: RFU68.2 RFU160.2
RFPINNET000122: RFU51.2 RFU172.2
RFPINNET000123: RFU109.2 RFU166.1
RFPINNET000124: RFU106.2 RFU165.1
RFPINNET000125: RFU71.2 RFU161.2
RFPINNET000126: RFU111.1 RFU112.2
RFPINNET000127: RFU89.1 RFU112.1
RFPINNET000129: RFU122.2 RFU152.2
RFPINNET000130: RFU74.2 RFU162.2
RFPINNET000131: RFU114.2 RFU115.2
RFPINNET000132: RFU92.1 RFU115.1
RFPINNET000133: RFU171.2 RFU172.1
RFPINNET000134: RFU77.2 RFU163.1
RFPINNET000135: RFU117.1 RFU118.2
RFPINNET000136: RFU95.1 RFU118.1
RFPINNET000138: RFU125.2 RFU150.2
RFPINNET000139: RFU80.2 RFU164.1
RFPINNET000140: RFU120.2 RFU121.2
RFPINNET000141: RFU98.1 RFU121.1
RFPINNET000142: RFU60.2 RFU174.2
RFPINNET000143: RFU173.2 RFU174.1
RFPINNET000145: RFU123.1 RFU124.2
RFPINNET000146: RFU101.1 RFU124.1
RFPINNET000147: RFU128.2 RFU149.2
RFPINNET000148: RFU57.1 RFU176.2
RFPINNET000149: RFU126.2 RFU127.2
RFPINNET000150: RFU104.1 RFU127.1
RFPINNET000151: RFU175.2 RFU176.1
RFPINNET000152: RFU89.2 RFU167.1
RFPINNET000153: RFU129.2 RFU130.2
RFPINNET000154: RFU116.1 RFU130.1
RFPINNET000155: RFU131.2 RFU145.2
RFPINNET000156: RFU92.2 RFU168.1
RFPINNET000157: RFU132.1 RFU133.2
RFPINNET000158: RFU113.1 RFU133.1
RFPINNET000159: RFU63.2 RFU178.2
RFPINNET000160: RFU95.2 RFU169.2
RFPINNET000161: RFU134.2 RFU146.2
RFPINNET000162: RFU98.2 RFU170.2
RFPINNET000163: RFU177.2 RFU178.1
RFPINNET000164: RFU101.2 RFU155.1
RFPINNET000165: RFU137.2 RFU147.1
RFPINNET000166: RFU104.2 RFU156.1
RFPINNET000167: RFU69.2 RFU180.2
RFPINNET000168: RFU107.2 RFU143.2
RFPINNET000169: RFU140.2 RFU148.1
RFPINNET000170: RFU110.2 RFU144.2
RFPINNET000171: RFU179.2 RFU180.1
RFPINNET000172: RFU113.2 RFU153.1
RFPINNET000173: RFU72.1 RFU182.2
RFPINNET000174: RFU181.2 RFU182.1
RFPINNET000175: RFU66.1 RFU184.2
RFPINNET000176: RFU183.2 RFU184.1
RFPINNET000177: RFU75.2 RFU186.2
RFPINNET000178: RFU185.2 RFU186.1
RFPINNET000179: RFU78.1 RFU188.2
RFPINNET000180: RFU187.2 RFU188.1
RFPINNET000181: RFU135.2 RFU190.2
RFPINNET000182: RFU189.2 RFU190.1
RFPINNET000183: RFU138.1 RFU192.2
RFPINNET000185: RFU191.2 RFU192.1
RFPINNET000186: RFU132.2 RFU194.2
RFPINNET000188: RFU193.2 RFU194.1
RFPINNET000189: RFU129.1 RFU196.2
RFPINNET000190: RFU195.2 RFU196.1
RFPINNET000191: RFU123.2 RFU198.2
RFPINNET000192: RFU197.2 RFU198.1
RFPINNET000194: RFU126.1 RFU200.2
RFPINNET000195: RFU199.2 RFU200.1
RFPINNET000196: RFU54.1 RFU202.2
RFPINNET000197: RFU201.2 RFU202.1
RFPINNET000198: RFU99.2 RFU204.2
RFPINNET000199: RFU203.2 RFU204.1
RFPINNET000200: RFU87.2 RFU206.2
RFPINNET000201: RFU205.2 RFU206.1
RFPINNET000202: RFU84.1 RFU208.2
RFPINNET000203: RFU207.2 RFU208.1
RFPINNET000204: RFU81.2 RFU210.2
RFPINNET000205: RFU209.2 RFU210.1
RFPINNET000206: RFU90.1 RFU212.2
RFPINNET000207: RFU211.2 RFU212.1
RFPINNET000208: RFU96.1 RFU214.2
RFPINNET000209: RFU213.2 RFU214.1
RFPINNET000211: RFU93.2 RFU216.2
RFPINNET000212: RFU215.2 RFU216.1
RFPINNET000213: RFU62.1 RFU218.2
RFPINNET000214: RFU217.2 RFU218.1
RFPINNET000215: RFU83.2 RFU220.2
RFPINNET000216: RFU219.2 RFU220.1
RFPINNET000217: RFU117.2 RFU222.2
RFPINNET000218: RFU221.2 RFU222.1
RFPINNET000219: RFU120.1 RFU224.2
RFPINNET000220: RFU223.2 RFU224.1
RFPINNET000221: RFU86.1 RFU226.2
RFPINNET000222: RFU225.2 RFU226.1
RFPINNET000223: RFU111.2 RFU228.2
RFPINNET000224: RFU227.2 RFU228.1
RFPINNET000225: RFU114.1 RFU230.2
RFPINNET000226: RFU229.2 RFU230.1
N01086: IC3.5 R1.2 RFU171.1
N01236: IC4.3 IC13.5 R1.1 RFU8.1 RFU201.1
N01468: IC1.5 R2.1 RFU175.1
N01612: IC3.3 IC7.5 R2.2 RFU10.1 RFU173.1
N01924: IC2.5 R3.1 RFU195.1
N02128: IC1.3 IC5.5 R3.2 RFU23.1 RFU193.1
N02304: IC6.5 R9.1 RFU177.1
N02444: IC7.3 IC8.5 R9.2 RFU14.1 RFU183.1
N02649: IC12.5 R7.1 RFU203.1
N02664: IC13.3 IC15.5 R7.2 RFU32.1 RFU217.1
N03004: IC10.5 R8.1 RFU205.1
N03112: IC9.5 R10.1 RFU225.1
N03124: IC11.5 IC15.3 R10.2 RFU44.1 RFU219.1
N03379: IC2.3 J3.1 R4.1 RFU29.1 RFU199.1
N03631: J8.1 R15.1 RFU227.1
N03641: J13.1 R14.1 RFU223.1
N03645: IC11.3 J16.1 R14.2 RFU47.1 RFU221.1
N03660: J6.1 R6.1 RFU181.1
N03664: IC6.3 J7.1 R6.2 RFU16.1 RFU179.1
N03694: IC8.3 J11.1 R13.2 RFU19.1 RFU187.1
N03732: IC14.3 J17.1 R11.2 RFU41.1 RFU213.1
N03747: J4.1 R5.1 RFU191.1
N03751: IC5.3 J5.1 R5.2 RFU26.1 RFU189.1
N07610: IC4.5
N11654: IC10.3 J14.1 R12.2 RFU37.1 RFU209.1
N13361: IC9.3 J10.1 R15.2 RFU49.1 RFU229.1
N17804: IC12.3 IC14.5 R8.2 RFU35.1 RFU211.1
N18224: J12.1 R12.1 RFU207.1
N18325: J9.1 R13.1 RFU185.1
N24339: J1.1 R4.2 RFU197.1
N24871: J15.1 R11.1 RFU215.1

## Via types
v1: diameter 0.499, hole 0.249, TOP to BOTTOM, 876 vias
v2: diameter 0.65, hole 0.4, TOP to BOTTOM, 156 vias

## Routing (per net, layer and track width the routed paths; a pad name or vN(x,y) marks a point on that pad's centre or on a via; arc(x,y) is an arc through that point)
GND:
  vias: v1(22.36,144.69) v1(22.36,143.55) v1(22.36,142.41) v1(22.36,88.76) v1(22.36,87.62) v1(22.36,86.47) v1(22.36,73.6) v1(22.36,72.45) v1(22.36,71.31) v1(22.36,17.67) v1(22.36,16.52) v1(22.36,15.38) v1(23.55,145.26) v1(23.55,144.12) v1(23.55,142.98) v1(23.55,141.83) v1(23.55,89.33) v1(23.55,88.19) v1(23.55,87.05) v1(23.55,85.9) v1(23.55,74.17) v1(23.55,73.03) v1(23.55,71.88) v1(23.55,70.74) v1(23.55,18.24) v1(23.55,17.09) v1(23.55,15.95) v1(23.55,14.81) v1(24.85,145.26) v1(24.85,141.83) v1(24.85,89.33) v1(24.85,85.9) v1(24.85,74.16) v1(24.85,70.74) v1(24.85,18.23) v1(24.85,14.8) v1(26.14,145.26) v1(26.14,141.83) v1(26.14,89.33) v1(26.14,85.9) v1(26.14,74.16) v1(26.14,70.74) v1(26.14,18.23) v1(26.14,14.8) v1(27.39,70.86) v1(27.48,145.03) v1(27.48,89.15) v1(27.48,73.91) v1(27.48,18.03) v1(27.58,141.99) v1(27.58,14.99) v1(27.96,86.11) v1(28.95,141.99) v1(28.95,70.87) v1(29.48,145.03) v1(29.48,89.15) v1(29.48,73.91) v1(29.48,18.03) v1(29.58,14.99) v1(29.96,86.11) v1(30.95,141.99) v1(30.95,70.87) v1(31.48,145.03) v1(31.48,89.15) v1(31.48,73.91) v1(31.48,18.03) v1(31.58,14.99) v1(31.96,86.11) v1(32.95,141.99) v1(32.95,70.87) v1(33.48,145.03) v1(33.48,89.15) v1(33.48,73.91) v1(33.48,18.03) v1(33.58,14.99) v1(33.96,86.11) v1(34.95,141.99) v1(34.95,70.87) v1(35.48,145.03) v1(35.48,89.15) v1(35.48,73.91) v1(35.48,18.03) v1(35.58,14.99) v1(35.96,86.11) v1(36.95,141.99) v1(36.95,70.87) v1(37.48,145.03) v1(37.48,89.15) v1(37.48,73.91) v1(37.48,18.03) v1(37.58,14.99) v1(37.96,86.11) v1(38.95,141.99) v1(38.95,70.87) v1(39.48,145.03) v1(39.48,89.15) v1(39.48,73.91) v1(39.48,18.03) v1(39.58,14.99) v1(39.96,86.11) v1(40.95,141.99) v1(40.95,70.87) v1(41.02,89.14) v1(40.97,19.08) v1(41.07,69.45) v1(41.19,140.5) v1(41.17,90.82) v1(41.31,92.21) v1(41.31,67.97) v1(41.27,21.06) v1(41.4,138.85) v1(41.48,145.03) v1(41.48,73.91) v1(41.63,93.61) v1(41.56,22.69) v1(41.58,14.99) v1(41.66,137.29) v1(41.66,135.29) v1(41.66,133.29) v1(41.66,131.29) v1(41.66,129.29) v1(41.66,127.29) v1(41.66,125.29) v1(41.66,123.29) v1(41.66,121.29) v1(41.66,119.29) v1(41.66,117.19) v1(41.66,113.65) v1(41.66,111.65) v1(41.66,109.65) v1(41.66,107.65) v1(41.66,105.65) v1(41.66,103.65) v1(41.66,101.65) v1(41.66,99.65) v1(41.66,97.65) v1(41.66,95.65) v1(41.68,66.15) v1(41.66,64.14) v1(41.66,62.14) v1(41.66,60.14) v1(41.66,58.14) v1(41.66,56.14) v1(41.66,54.14) v1(41.66,52.14) v1(41.66,50.14) v1(41.66,48.14) v1(41.69,46.09) v1(41.66,42.53) v1(41.66,40.53) v1(41.66,38.53) v1(41.66,36.53) v1(41.66,34.53) v1(41.66,32.53) v1(41.66,30.53) v1(41.66,28.53) v1(41.66,26.53) v1(41.66,24.53) v1(41.96,86.11) v1(42.3,44.46) v1(42.37,115.6) v1(43.18,144.49) v1(43.18,140.41) v1(43.18,90.74) v1(43.19,86.9) v1(43.18,72.87) v1(43.18,69.28) v1(43.18,19.61) v1(43.23,15.72) v1(44.04,14.99) v1(44.3,86.11) v1(44.69,145.03) v1(44.7,137.27) v1(44.7,135.27) v1(44.7,133.27) v1(44.7,131.27) v1(44.7,129.27) v1(44.7,127.27) v1(44.7,125.27) v1(44.7,123.27) v1(44.7,121.27) v1(44.7,119.27) v1(44.7,111.64) v1(44.7,109.64) v1(44.7,107.64) v1(44.7,105.64) v1(44.7,103.64) v1(44.7,101.64) v1(44.7,99.64) v1(44.7,97.64) v1(44.7,95.64) v1(44.7,93.64) v1(44.69,73.91) v1(44.7,66.15) v1(44.7,64.15) v1(44.7,62.15) v1(44.7,60.15) v1(44.7,58.15) v1(44.7,56.15) v1(44.7,54.15) v1(44.7,52.15) v1(44.7,50.15) v1(44.7,48.15) v1(44.7,40.52) v1(44.7,38.52) v1(44.7,36.52) v1(44.7,34.52) v1(44.7,32.52) v1(44.7,30.52) v1(44.7,28.52) v1(44.7,26.52) v1(44.7,24.52) v1(44.76,113.37) v1(44.78,22.39) v1(44.94,138.91) v1(44.96,91.88) v1(44.96,42.15) v1(45.19,140.5) v1(45.2,67.91) v1(45.27,141.97) v1(45.25,20.49) v1(45.42,90.08) v1(45.42,69.48) v1(45.45,18.77) v1(45.54,117.73) v1(45.51,46.73) v1(46.04,14.99) v1(46.16,86.11) v1(46.16,70.87) v1(46.28,115.57) v1(46.28,44.45) v1(46.63,142.02) v1(46.62,113.47) v1(46.69,145.03) v1(46.69,89.15) v1(46.69,73.91) v1(46.74,18.03) v1(46.79,42.5) v1(47.34,117.43) v1(47.32,46.43) v1(48.04,14.99) v1(48.16,141.99) v1(48.16,86.11) v1(48.16,70.87) v1(48.42,42.61) v1(48.57,113.82) v1(48.69,145.03) v1(48.69,89.15) v1(48.69,73.91) v1(48.74,18.03) v1(49.04,117.09) v1(49.04,45.97) v1(50.04,14.99) v1(50.16,141.99) v1(50.16,86.11) v1(50.16,70.87) v1(50.37,114.05) v1(50.38,42.93) v1(50.69,145.03) v1(50.69,89.15) v1(50.69,73.91) v1(50.74,18.03) v1(51.04,117.09) v1(51.04,45.97) v1(52.04,14.99) v1(52.16,141.99) v1(52.16,86.11) v1(52.16,70.87) v1(52.37,114.05) v1(52.38,42.93) v1(52.69,145.03) v1(52.69,89.15) v1(52.69,73.91) v1(52.74,18.03) v1(53.04,117.09) v1(53.04,45.97) v1(54.04,14.99) v1(54.16,141.99) v1(54.16,86.11) v1(54.16,70.87) v1(54.37,114.05) v1(54.38,42.93) v1(54.69,145.03) v1(54.69,89.15) v1(54.69,73.91) v1(54.74,18.03) v1(55.04,117.09) v1(55.04,45.97) v1(56.04,14.99) v1(56.16,141.99) v1(56.16,86.11) v1(56.16,70.87) v1(56.37,114.05) v1(56.38,42.93) v1(56.69,145.03) v1(56.69,89.15) v1(56.69,73.91) v1(56.74,18.03) v1(57.04,117.09) v1(57.04,45.97) v1(58.04,14.99) v1(58.16,141.99) v1(58.16,86.11) v1(58.16,70.87) v1(58.37,114.05) v1(58.38,42.93) v1(58.69,145.03) v1(58.69,89.15) v1(58.69,73.91) v1(58.74,18.03) v1(59.04,117.09) v1(59.04,45.97) v1(60.12,145.19) v1(60.12,141.76) v1(60.19,89.34) v1(60.19,85.91) v1(60.19,74.17) v1(60.19,70.74) v1(60.27,18.24) v1(60.27,14.81) v1(60.37,114.05) v1(60.38,42.93) v1(61.04,117.09) v1(61.04,45.97) v1(61.41,145.19) v1(61.41,141.76) v1(61.49,89.34) v1(61.49,85.91) v1(61.49,74.17) v1(61.49,70.74) v1(61.56,18.24) v1(61.56,14.81) v1(62.37,114.05) v1(62.38,42.93) v1(62.71,145.19) v1(62.71,144.04) v1(62.71,142.9) v1(62.71,141.76) v1(62.79,89.33) v1(62.79,88.19) v1(62.79,87.05) v1(62.79,85.9) v1(62.79,74.17) v1(62.79,73.03) v1(62.79,71.88) v1(62.79,70.74) v1(62.87,18.24) v1(62.87,17.09) v1(62.87,15.95) v1(62.87,14.81) v1(63.04,117.09) v1(63.04,45.97) v1(63.89,144.61) v1(63.89,143.47) v1(63.89,142.33) v1(63.97,88.76) v1(63.97,87.62) v1(63.97,86.47) v1(63.97,73.6) v1(63.97,72.45) v1(63.97,71.31) v1(64.05,17.67) v1(64.05,16.52) v1(64.05,15.38) v1(64.37,114.05) v1(64.38,42.93) v1(65.04,117.09) v1(65.04,45.97) v1(66.37,114.05) v1(66.38,42.93) v1(67.04,117.09) v1(67.04,45.97) v1(68.37,114.05) v1(68.38,42.93) v1(69.04,117.09) v1(69.04,45.97) v1(70.37,114.05) v1(70.38,42.93) v1(71.04,117.09) v1(71.04,45.97) v1(72.37,114.05) v1(72.38,42.93) v1(73.04,117.09) v1(73.04,45.97) v1(74.37,114.05) v1(74.38,42.93) v1(75.04,117.09) v1(75.04,45.97) v1(76.37,114.05) v1(76.38,42.93) v1(76.45,112.44) v1(76.57,46.01) v1(76.67,47.65) v1(76.78,111.18) v1(76.9,49.35) v1(77.04,117.09) v1(77.14,109.75) v1(77.22,108.38) v1(77.22,106.38) v1(77.22,104.38) v1(77.22,102.38) v1(77.22,100.38) v1(77.22,98.38) v1(77.22,96.38) v1(77.22,94.38) v1(77.22,92.38) v1(77.22,90.38) v1(77.22,88.38) v1(77.22,86.38) v1(77.22,84.38) v1(77.22,82.38) v1(77.22,79.07) v1(77.22,77.07) v1(77.22,75.07) v1(77.22,73.07) v1(77.22,71.07) v1(77.22,69.07) v1(77.22,67.07) v1(77.22,65.07) v1(77.22,63.07) v1(77.22,61.07) v1(77.22,59.07) v1(77.22,57.07) v1(77.22,55.07) v1(77.22,53.07) v1(77.22,51.07) v1(78,80.08) v1(78.7,116.43) v1(78.73,112.47) v1(78.74,47.58) v1(78.75,43.5) v1(80.26,109.71) v1(80.26,107.71) v1(80.26,105.71) v1(80.26,103.71) v1(80.26,101.71) v1(80.26,99.71) v1(80.26,97.71) v1(80.26,95.71) v1(80.26,93.71) v1(80.26,91.71) v1(80.26,89.71) v1(80.26,87.71) v1(80.26,85.71) v1(80.26,83.71) v1(80.26,76.48) v1(80.26,74.48) v1(80.26,72.48) v1(80.26,70.48) v1(80.26,68.48) v1(80.26,66.48) v1(80.26,64.48) v1(80.26,62.48) v1(80.26,60.48) v1(80.26,58.48) v1(80.26,56.48) v1(80.26,54.48) v1(80.26,52.48) v1(80.32,50.73) v1(80.44,42.93) v1(80.55,111.39) v1(80.55,49.32) v1(80.73,47.61) v1(80.83,117.09) v1(80.77,112.77) v1(80.95,114.1) v1(80.95,45.97) v1(81.11,82.17) v1(81.23,77.63) v1(81.85,80.01) v1(82.44,114.05) v1(82.44,42.93) v1(82.74,81.85) v1(82.83,117.09) v1(82.81,45.97) v1(83.03,78.23) v1(84.26,81.53) v1(84.44,114.05) v1(84.44,42.93) v1(84.51,78.5) v1(84.83,117.09) v1(84.81,45.97) v1(85.72,81.71) v1(85.72,78.28) v1(86.44,114.05) v1(86.44,42.93) v1(86.83,117.09) v1(86.81,45.97) v1(87.02,81.71) v1(87.02,78.28) v1(88.32,81.7) v1(88.32,80.56) v1(88.32,79.42) v1(88.32,78.28) v1(88.44,114.05) v1(88.44,42.93) v1(88.83,117.09) v1(88.81,45.97) v1(89.5,81.13) v1(89.5,79.99) v1(89.5,78.85) v1(90.44,114.05) v1(90.44,42.93) v1(90.83,117.09) v1(90.81,45.97) v1(92.44,114.05) v1(92.44,42.93) v1(92.83,117.09) v1(92.81,45.97) v1(94.44,114.05) v1(94.44,42.93) v1(94.83,117.09) v1(94.81,45.97) v1(96.05,144.69) v1(96.05,143.55) v1(96.05,142.41) v1(96.05,88.84) v1(96.05,87.69) v1(96.05,86.55) v1(96.05,73.6) v1(96.05,72.45) v1(96.05,71.31) v1(96.05,17.67) v1(96.05,16.52) v1(96.05,15.38) v1(96.44,114.05) v1(96.44,42.93) v1(96.83,117.09) v1(96.81,45.97) v1(97.23,145.26) v1(97.23,144.12) v1(97.23,142.98) v1(97.23,141.83) v1(97.23,89.41) v1(97.23,88.27) v1(97.23,87.12) v1(97.23,85.98) v1(97.23,74.17) v1(97.23,73.03) v1(97.23,71.88) v1(97.23,70.74) v1(97.23,18.24) v1(97.23,17.09) v1(97.23,15.95) v1(97.23,14.81) v1(98.44,114.05) v1(98.44,42.93) v1(98.53,145.26) v1(98.53,141.83) v1(98.53,89.4) v1(98.53,85.98) v1(98.53,74.16) v1(98.53,70.74) v1(98.53,18.23) v1(98.53,14.8) v1(98.83,117.09) v1(98.81,45.97) v1(99.83,145.26) v1(99.83,141.83) v1(99.83,89.4) v1(99.83,85.98) v1(99.83,74.16) v1(99.83,70.74) v1(99.83,18.23) v1(99.83,14.8) v1(100.44,114.05) v1(100.44,42.93) v1(100.83,117.09) v1(100.81,45.97) v1(101.04,86.07) v1(101.14,145.03) v1(101.13,141.94) v1(101.14,89.15) v1(101.14,73.91) v1(101.14,70.83) v1(101.14,18.03) v1(101.37,14.99) v1(102.44,114.05) v1(102.44,42.93) v1(102.61,141.99) v1(102.61,86.11) v1(102.61,70.87) v1(102.83,117.09) v1(102.81,45.97) v1(103.14,145.03) v1(103.14,89.15) v1(103.14,73.91) v1(103.14,18.03) v1(103.37,14.99) v1(104.44,114.05) v1(104.44,42.93) v1(104.61,141.99) v1(104.61,86.11) v1(104.61,70.87) v1(104.83,117.09) v1(104.81,45.97) v1(105.14,145.03) v1(105.14,89.15) v1(105.14,73.91) v1(105.14,18.03) v1(105.37,14.99) v1(106.44,114.05) v1(106.44,42.93) v1(106.61,141.99) v1(106.61,86.11) v1(106.61,70.87) v1(106.83,117.09) v1(106.81,45.97) v1(107.14,145.03) v1(107.14,89.15) v1(107.14,73.91) v1(107.14,18.03) v1(107.37,14.99) v1(108.44,114.05) v1(108.44,42.93) v1(108.61,141.99) v1(108.61,86.11) v1(108.61,70.87) v1(108.83,117.09) v1(108.81,45.97) v1(109.14,145.03) v1(109.14,89.15) v1(109.14,73.91) v1(109.14,18.03) v1(109.37,14.99) v1(110.44,114.05) v1(110.44,42.93) v1(110.61,141.99) v1(110.61,86.11) v1(110.61,70.87) v1(110.66,117.19) v1(110.81,45.97) v1(111.14,145.03) v1(111.14,89.15) v1(111.14,73.91) v1(111.14,18.03) v1(111.37,14.99) v1(112.1,113.73) v1(112.5,117.73) v1(112.61,141.99) v1(112.61,86.11) v1(112.61,70.87) v1(112.63,46.37) v1(112.61,42.45) v1(113.14,145.03) v1(113.14,89.15) v1(113.14,73.91) v1(113.14,18.03) v1(113.37,14.99) v1(113.74,115.57) v1(113.66,113.55) v1(113.71,44.44) v1(114.36,42.17) v1(114.48,117.9) v1(114.46,46.65) v1(114.61,141.99) v1(114.61,140.69) v1(114.61,90.11) v1(114.61,86.11) v1(114.61,70.87) v1(114.61,69.19) v1(114.58,19.01) v1(114.86,139.2) v1(114.94,67.69) v1(114.89,20.79) v1(115.04,91.95) v1(115.14,145.03) v1(115.14,73.91) v1(115.22,22.43) v1(115.27,137.53) v1(115.32,135.29) v1(115.32,133.29) v1(115.32,131.29) v1(115.32,129.29) v1(115.32,127.29) v1(115.32,125.29) v1(115.32,123.29) v1(115.32,121.29) v1(115.32,119.29) v1(115.28,113.49) v1(115.32,111.65) v1(115.32,109.65) v1(115.32,107.65) v1(115.32,105.65) v1(115.32,103.65) v1(115.32,101.65) v1(115.32,99.65) v1(115.32,97.65) v1(115.32,95.65) v1(115.33,93.74) v1(115.32,66.12) v1(115.32,64.12) v1(115.32,62.12) v1(115.32,60.12) v1(115.32,58.12) v1(115.32,56.12) v1(115.32,54.12) v1(115.32,52.12) v1(115.32,50.12) v1(115.32,48.12) v1(115.32,40.51) v1(115.32,38.51) v1(115.32,36.51) v1(115.32,34.51) v1(115.32,32.51) v1(115.32,30.51) v1(115.32,28.51) v1(115.32,26.51) v1(115.32,24.51) v1(115.37,14.99) v1(116.82,144.4) v1(116.84,140.41) v1(116.84,90.74) v1(116.84,86.11) v1(116.79,73.19) v1(116.84,69.27) v1(116.84,19.64) v1(116.87,15.86) v1(117.81,115.57) v1(117.82,86.11) v1(117.81,44.48) v1(117.82,14.99) v1(118.35,145.03) v1(118.36,137.27) v1(118.36,135.27) v1(118.36,133.27) v1(118.36,131.27) v1(118.36,129.27) v1(118.36,127.27) v1(118.36,125.27) v1(118.36,123.27) v1(118.36,121.27) v1(118.36,119.27) v1(118.36,117.27) v1(118.36,113.64) v1(118.36,111.64) v1(118.36,109.64) v1(118.36,107.64) v1(118.36,105.64) v1(118.36,103.64) v1(118.36,101.64) v1(118.36,99.64) v1(118.36,97.64) v1(118.36,95.64) v1(118.36,93.64) v1(118.35,73.91) v1(118.36,66.15) v1(118.36,64.15) v1(118.36,62.15) v1(118.36,60.15) v1(118.36,58.15) v1(118.36,56.15) v1(118.36,54.15) v1(118.36,52.15) v1(118.36,50.15) v1(118.36,48.15) v1(118.36,46.15) v1(118.36,42.54) v1(118.36,40.54) v1(118.36,38.54) v1(118.36,36.54) v1(118.36,34.54) v1(118.36,32.54) v1(118.36,30.54) v1(118.36,28.54) v1(118.36,26.54) v1(118.36,24.54) v1(118.36,22.54) v1(118.63,92.05) v1(118.76,139.18) v1(118.76,67.68) v1(119.02,90.04) v1(119,20.87) v1(119.06,140.69) v1(119.09,69.19) v1(119.27,19.15) v1(119.82,141.99) v1(119.82,86.11) v1(119.82,70.87) v1(119.82,14.99) v1(120.35,145.03) v1(120.35,89.15) v1(120.35,73.91) v1(120.35,18.03) v1(121.82,141.99) v1(121.82,86.11) v1(121.82,70.87) v1(121.82,14.99) v1(122.35,145.03) v1(122.35,89.15) v1(122.35,73.91) v1(122.35,18.03) v1(123.82,141.99) v1(123.82,86.11) v1(123.82,70.87) v1(123.82,14.99) v1(124.35,145.03) v1(124.35,89.15) v1(124.35,73.91) v1(124.35,18.03) v1(125.82,141.99) v1(125.82,86.11) v1(125.82,70.87) v1(125.82,14.99) v1(126.35,145.03) v1(126.35,89.15) v1(126.35,73.91) v1(126.35,18.03) v1(127.82,141.99) v1(127.82,86.11) v1(127.82,70.87) v1(127.82,14.99) v1(128.35,145.03) v1(128.35,89.15) v1(128.35,73.91) v1(128.35,18.03) v1(129.82,141.99) v1(129.82,86.11) v1(129.82,70.87) v1(129.82,14.99) v1(130.35,145.03) v1(130.35,89.15) v1(130.35,73.91) v1(130.35,18.03) v1(131.82,141.99) v1(131.82,86.11) v1(131.82,70.87) v1(131.82,14.99) v1(132.35,145.03) v1(132.35,89.15) v1(132.35,73.91) v1(132.35,18.03) v1(133.8,89.34) v1(133.8,85.91) v1(133.8,18.24) v1(133.8,14.81) v1(133.88,145.27) v1(133.88,141.84) v1(133.95,74.1) v1(133.95,70.67) v1(135.1,89.34) v1(135.1,85.91) v1(135.1,18.24) v1(135.1,14.81) v1(135.17,145.27) v1(135.17,141.84) v1(135.25,74.1) v1(135.25,70.67) v1(136.4,89.33) v1(136.4,88.19) v1(136.4,87.05) v1(136.4,85.9) v1(136.4,18.24) v1(136.4,17.09) v1(136.4,15.95) v1(136.4,14.81) v1(136.47,145.26) v1(136.47,144.12) v1(136.47,142.98) v1(136.47,141.83) v1(136.55,74.09) v1(136.55,72.95) v1(136.55,71.81) v1(136.55,70.66) v1(137.58,88.76) v1(137.58,87.62) v1(137.58,86.47) v1(137.58,17.67) v1(137.58,16.52) v1(137.58,15.38) v1(137.66,144.69) v1(137.66,143.55) v1(137.66,142.41) v1(137.73,73.52) v1(137.73,72.38) v1(137.73,71.23) v2(2.16,154.09) v2(2.16,150.09) v2(2.16,146.09) v2(2.16,142.09) v2(2.16,138.09) v2(2.16,134.09) v2(2.16,130.09) v2(2.16,126.09) v2(2.16,122.09) v2(2.16,118.09) v2(2.16,114.09) v2(2.16,110.09) v2(2.16,106.09) v2(2.16,102.09) v2(2.16,98.09) v2(2.16,94.09) v2(2.16,90.09) v2(2.16,86.09) v2(2.16,82.09) v2(2.16,78.09) v2(2.16,74.09) v2(2.16,70.09) v2(2.16,66.09) v2(2.16,62.09) v2(2.16,58.09) v2(2.16,54.09) v2(2.16,50.09) v2(2.16,46.09) v2(2.16,42.09) v2(2.16,38.09) v2(2.16,34.09) v2(2.16,30.09) v2(2.16,26.09) v2(2.16,22.09) v2(2.16,18.09) v2(2.16,14.09) v2(2.16,10.09) v2(2.16,6.09) v2(2.31,158.06) v2(2.38,2.03) v2(6.31,158.06) v2(6.38,2.03) v2(10.31,158.06) v2(10.38,2.03) v2(14.31,158.06) v2(14.38,2.03) v2(18.31,158.06) v2(18.38,2.03) v2(22.31,158.06) v2(22.38,2.03) v2(26.31,158.06) v2(26.38,2.03) v2(30.31,158.06) v2(30.38,2.03) v2(34.31,158.06) v2(34.38,2.03) v2(38.31,158.06) v2(38.38,2.03) v2(42.31,158.06) v2(42.38,2.03) v2(46.31,158.06) v2(46.38,2.03) v2(50.31,158.06) v2(50.38,2.03) v2(54.31,158.06) v2(54.38,2.03) v2(58.31,158.06) v2(58.38,2.03) v2(62.31,158.06) v2(62.38,2.03) v2(66.31,158.06) v2(66.38,2.03) v2(70.31,158.06) v2(70.38,2.03) v2(74.31,158.06) v2(74.38,2.03) v2(78.31,158.06) v2(78.38,2.03) v2(82.31,158.06) v2(82.38,2.03) v2(86.31,158.06) v2(86.38,2.03) v2(90.31,158.06) v2(90.38,2.03) v2(94.31,158.06) v2(94.38,2.03) v2(98.31,158.06) v2(98.38,2.03) v2(102.31,158.06) v2(102.38,2.03) v2(106.31,158.06) v2(106.38,2.03) v2(110.31,158.06) v2(110.38,2.03) v2(114.31,158.06) v2(114.38,2.03) v2(118.31,158.06) v2(118.38,2.03) v2(122.31,158.06) v2(122.38,2.03) v2(126.31,158.06) v2(126.38,2.03) v2(130.31,158.06) v2(130.38,2.03) v2(134.31,158.06) v2(134.38,2.03) v2(138.31,158.06) v2(138.38,2.03) v2(142.31,158.06) v2(142.38,2.03) v2(146.31,158.06) v2(146.38,2.03) v2(150.31,158.06) v2(150.38,2.03) v2(154.31,158.06) v2(154.38,2.03) v2(158.31,158.06) v2(158.35,154.07) v2(158.35,150.07) v2(158.35,146.07) v2(158.35,142.07) v2(158.35,138.07) v2(158.35,134.07) v2(158.35,130.07) v2(158.35,126.07) v2(158.35,122.07) v2(158.35,118.07) v2(158.35,114.07) v2(158.35,110.07) v2(158.35,106.07) v2(158.35,102.07) v2(158.35,98.07) v2(158.35,94.07) v2(158.35,90.07) v2(158.35,86.07) v2(158.35,82.07) v2(158.35,78.07) v2(158.35,74.07) v2(158.35,70.07) v2(158.35,66.07) v2(158.35,62.07) v2(158.35,58.07) v2(158.35,54.07) v2(158.35,50.07) v2(158.35,46.07) v2(158.35,42.07) v2(158.35,38.07) v2(158.35,34.07) v2(158.35,30.07) v2(158.35,26.07) v2(158.35,22.07) v2(158.35,18.07) v2(158.35,14.07) v2(158.35,10.07) v2(158.35,6.07) v2(158.38,2.03)

## Copper pours and planes (outline as drawn; the poured copper is in the pictures)
GND on TOP: 0,160.02 0,0 160.02,0 160.02,160.02
GND on BOTTOM: 160.02,0 160.02,160.02 0,160.02 0,0
RFETCHSHAPENET on TOP (solid shape): 42.04,143.13 27.11,143.13 27.11,143.89 42.04,143.89
RFETCHSHAPENET on TOP (solid shape): 42.04,87.25 27.11,87.25 27.11,88.01 42.04,88.01
RFETCHSHAPENET on TOP (solid shape): 42.04,72.01 27.11,72.01 27.11,72.77 42.04,72.77
RFETCHSHAPENET on TOP (solid shape): 42.04,16.13 27.11,16.13 27.11,16.89 42.04,16.89
RFETCHSHAPENET on TOP (solid shape): 42.91,141.25 42.15,141.25 42.15,143.02 42.91,143.02
RFETCHSHAPENET on TOP (solid shape): 42.91,88.12 42.15,88.12 42.15,89.89 42.91,89.89
RFETCHSHAPENET on TOP (solid shape): 42.91,70.13 42.15,70.13 42.15,71.9 42.91,71.9
RFETCHSHAPENET on TOP (solid shape): 42.91,17 42.15,17 42.15,18.77 42.91,18.77
RFETCHSHAPENET on TOP (solid shape): 43.56,116.71 42.8,116.71 42.8,138.07 43.56,138.07
RFETCHSHAPENET on TOP (solid shape): 43.56,93.07 42.8,93.07 42.8,114.43 43.56,114.43
RFETCHSHAPENET on TOP (solid shape): 43.56,45.59 42.8,45.59 42.8,66.93 43.56,66.93
RFETCHSHAPENET on TOP (solid shape): 43.56,21.96 42.8,21.96 42.8,43.31 43.56,43.31
RFETCHSHAPENET on TOP (solid shape): 44.21,141.25 43.45,141.25 43.45,143.02 44.21,143.02
RFETCHSHAPENET on TOP (solid shape): 44.21,88.12 43.45,88.12 43.45,89.89 44.21,89.89
RFETCHSHAPENET on TOP (solid shape): 44.21,70.13 43.45,70.13 43.45,71.9 44.21,71.9
RFETCHSHAPENET on TOP (solid shape): 44.21,17 43.45,17 43.45,18.77 44.21,18.77
RFETCHSHAPENET on TOP (solid shape): 45.44,115.84 43.67,115.84 43.67,116.6 45.44,116.6
RFETCHSHAPENET on TOP (solid shape): 45.44,114.54 43.67,114.54 43.67,115.3 45.44,115.3
RFETCHSHAPENET on TOP (solid shape): 45.44,44.72 43.67,44.72 43.67,45.48 45.44,45.48
RFETCHSHAPENET on TOP (solid shape): 45.44,43.42 43.67,43.42 43.67,44.18 45.44,44.18
RFETCHSHAPENET on TOP (solid shape): 59.25,143.13 44.32,143.13 44.32,143.89 59.25,143.89
RFETCHSHAPENET on TOP (solid shape): 59.25,87.25 44.32,87.25 44.32,88.01 59.25,88.01
RFETCHSHAPENET on TOP (solid shape): 59.25,72.01 44.32,72.01 44.32,72.77 59.25,72.77
RFETCHSHAPENET on TOP (solid shape): 59.3,16.13 44.32,16.13 44.32,16.89 59.3,16.89
RFETCHSHAPENET on TOP (solid shape): 77.6,115.19 48.62,115.19 48.62,115.95 77.6,115.95
RFETCHSHAPENET on TOP (solid shape): 77.6,44.07 48.63,44.07 48.63,44.83 77.6,44.83
RFETCHSHAPENET on TOP (solid shape): 78.47,113.31 77.71,113.31 77.71,115.08 78.47,115.08
RFETCHSHAPENET on TOP (solid shape): 78.47,44.94 77.71,44.94 77.71,46.71 78.47,46.71
RFETCHSHAPENET on TOP (solid shape): 79.12,81.15 78.36,81.15 78.36,110.13 79.12,110.13
RFETCHSHAPENET on TOP (solid shape): 79.12,49.92 78.36,49.92 78.36,78.87 79.12,78.87
RFETCHSHAPENET on TOP (solid shape): 79.77,113.31 79.01,113.31 79.01,115.08 79.77,115.08
RFETCHSHAPENET on TOP (solid shape): 79.77,44.94 79.01,44.94 79.01,46.71 79.77,46.71
RFETCHSHAPENET on TOP (solid shape): 81,80.28 79.23,80.28 79.23,81.04 81,81.04
RFETCHSHAPENET on TOP (solid shape): 81,78.98 79.23,78.98 79.23,79.74 81,79.74
RFETCHSHAPENET on TOP (solid shape): 111.37,44.07 79.88,44.07 79.88,44.83 111.37,44.83
RFETCHSHAPENET on TOP (solid shape): 111.4,115.19 79.88,115.19 79.88,115.95 111.4,115.95
RFETCHSHAPENET on TOP (solid shape): 115.7,143.13 100.77,143.13 100.77,143.89 115.7,143.89
RFETCHSHAPENET on TOP (solid shape): 115.7,87.25 100.77,87.25 100.77,88.01 115.7,88.01
RFETCHSHAPENET on TOP (solid shape): 115.7,72.01 100.77,72.01 100.77,72.77 115.7,72.77
RFETCHSHAPENET on TOP (solid shape): 115.7,16.13 100.77,16.13 100.77,16.89 115.7,16.89
RFETCHSHAPENET on TOP (solid shape): 116.35,115.84 114.58,115.84 114.58,116.6 116.35,116.6
RFETCHSHAPENET on TOP (solid shape): 116.35,114.54 114.58,114.54 114.58,115.3 116.35,115.3
RFETCHSHAPENET on TOP (solid shape): 116.35,44.72 114.58,44.72 114.58,45.48 116.35,45.48
RFETCHSHAPENET on TOP (solid shape): 116.35,43.42 114.58,43.42 114.58,44.18 116.35,44.18
RFETCHSHAPENET on TOP (solid shape): 116.57,141.25 115.81,141.25 115.81,143.02 116.57,143.02
RFETCHSHAPENET on TOP (solid shape): 116.57,88.12 115.81,88.12 115.81,89.89 116.57,89.89
RFETCHSHAPENET on TOP (solid shape): 116.57,70.13 115.81,70.13 115.81,71.9 116.57,71.9
RFETCHSHAPENET on TOP (solid shape): 116.57,17 115.81,17 115.81,18.77 116.57,18.77
RFETCHSHAPENET on TOP (solid shape): 117.22,116.71 116.46,116.71 116.46,138.07 117.22,138.07
RFETCHSHAPENET on TOP (solid shape): 117.22,93.07 116.46,93.07 116.46,114.43 117.22,114.43
RFETCHSHAPENET on TOP (solid shape): 117.22,45.59 116.46,45.59 116.46,66.92 117.22,66.92
RFETCHSHAPENET on TOP (solid shape): 117.22,21.98 116.46,21.98 116.46,43.31 117.22,43.31
RFETCHSHAPENET on TOP (solid shape): 117.87,141.25 117.11,141.25 117.11,143.02 117.87,143.02
RFETCHSHAPENET on TOP (solid shape): 117.87,88.12 117.11,88.12 117.11,89.89 117.87,89.89
RFETCHSHAPENET on TOP (solid shape): 117.87,70.13 117.11,70.13 117.11,71.9 117.87,71.9
RFETCHSHAPENET on TOP (solid shape): 117.87,17 117.11,17 117.11,18.77 117.87,18.77
RFETCHSHAPENET on TOP (solid shape): 132.91,143.13 117.98,143.13 117.98,143.89 132.91,143.89
RFETCHSHAPENET on TOP (solid shape): 132.91,87.25 117.98,87.25 117.98,88.01 132.91,88.01
RFETCHSHAPENET on TOP (solid shape): 132.91,72.01 117.98,72.01 117.98,72.77 132.91,72.77
RFETCHSHAPENET on TOP (solid shape): 132.91,16.13 117.98,16.13 117.98,16.89 132.91,16.89
